# Altium PCB power amp.PcbDoc
Units mm, origin at the board's own origin, x right, y up, seen from the top; angles counter-clockwise.
Board outline 166.75 x 72.39 mm, 2 copper layers (Top Layer, Bottom Layer); 36 components, 39 nets, 132 pads, 16 vias.
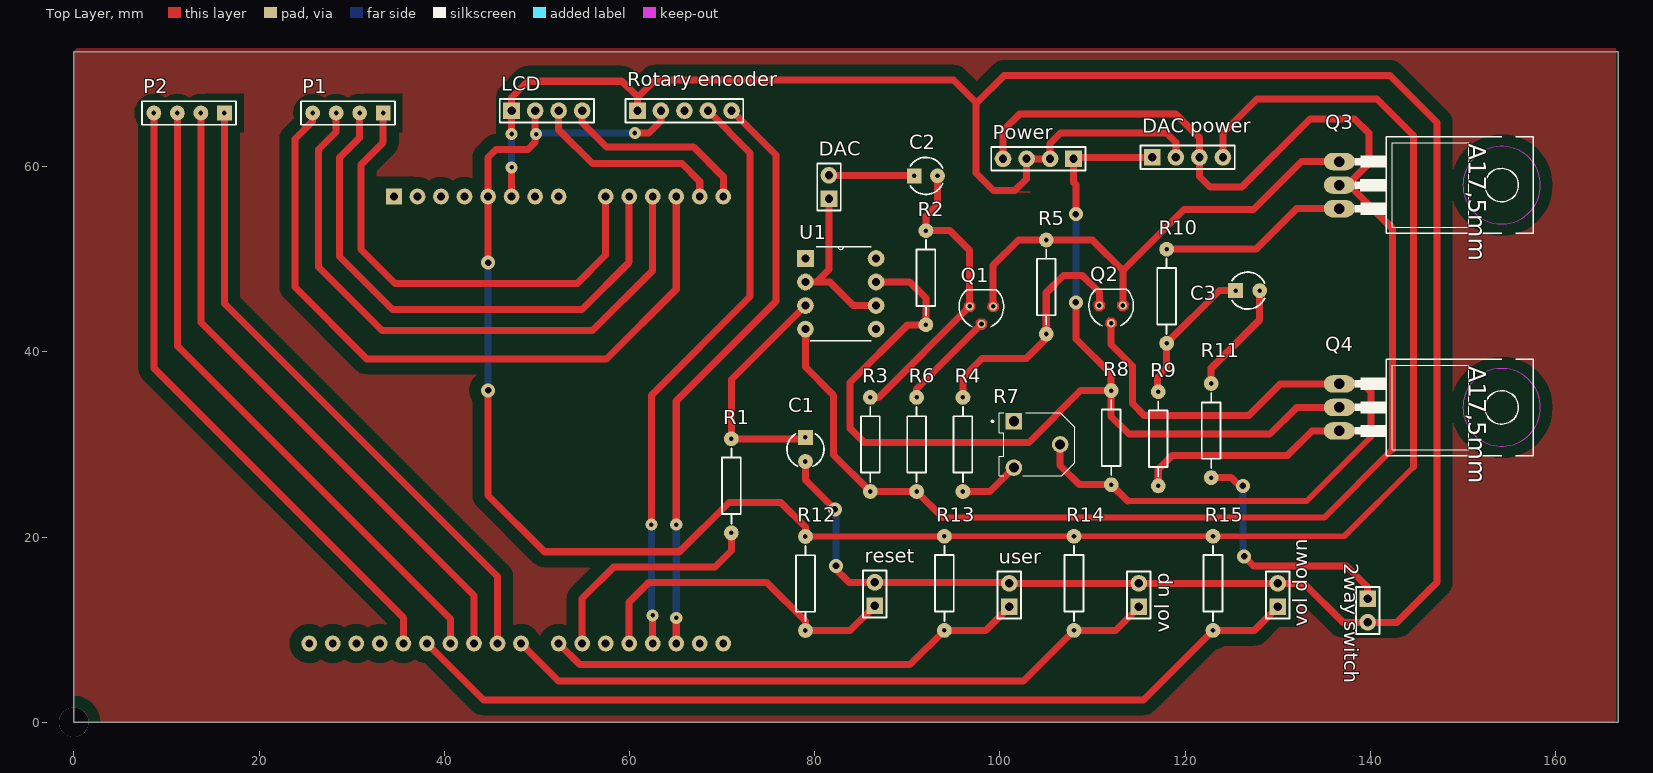
[diagram p0: Top Layer view]
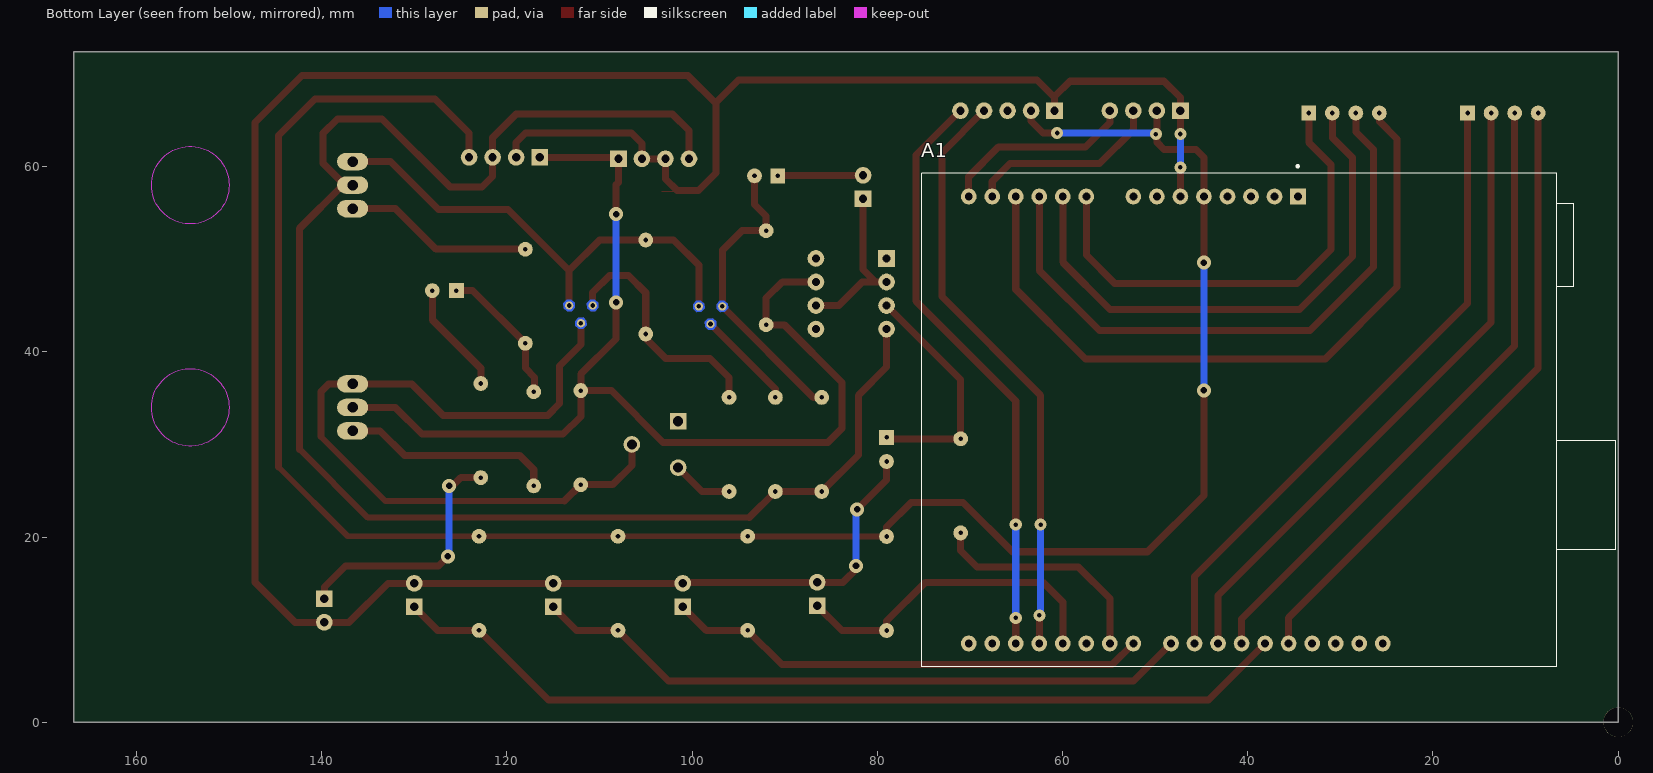
[diagram p1: Bottom Layer view, seen from below]

## Layer stack, top to bottom
Top Solder: solder mask 0.0102, Solder Resist, Dk 3.5
Top Layer: signal copper 0.0356
Dielectric 1: dielectric 0.32, FR-4, Dk 4.8
Bottom Layer: signal copper 0.0356
Bottom Solder: solder mask 0.0102, Solder Resist, Dk 3.5

## Board outline
0,0 166.751,0 166.751,72.39 0,72.39

## Design rules (kind name [scope] priority, off if disabled: settings)
Clearance Clearance_1 [InNamedPolygon('Top Layer-GND')] p1: gap=1.27 ignorepadtopadclearanceinfootprint=FALSE
Clearance [All] p2: gap=0.254 ignorepadtopadclearanceinfootprint=FALSE except(0: Arc-Hole Track-Hole SMDPad-Hole THPad-Hole Via-Hole Fill-Hole Poly-Hole Region-Hole Text-Hole; 0.508: Arc-Arc Arc-Track Arc-THPad Track-Track Track-THPad)
PolygonConnect [All] p1: connectstyle=Relief reliefconductorwidth=0.254 reliefentries=4 polygonreliefangle="90 Angle" airgapwidth=0.254
RoutingVias [All] p1: holewidth=0.711 width=1.27 viastyle="Through Hole" minholewidth=0.711 minwidth=1.27 maxholewidth=0.711 maxwidth=1.27
SolderMaskExpansion [All] p1: expansion=0.102
Width [All] p1: maxlimit=0.813 minlimit=0.508 preferedwidth=0.762 minimp=50.000000 maximp=50.000000 favimp=50.000000
30 further rules are at their usual default settings.

## Components (designator, comment, footprint, x,y, rotation, side; value= is the part's Value field where it differs from the comment)
"2way switch" "Header 2" HDR1X2 139.7,13.335 r270 top
A1 "ARDUINO_UNO_REV3_DEVELOPMENT_BOARD" *ARDUINO_UNO_REV3_DEVELOPMENT_BOARD 40.915,32.639 r270 bottom
C1 "Cap2" CAPR5-4X5#1 78.994,29.464 r270 top value=0.01uF
C2 "Cap2" CAPR5-4X5#2 92,59 r0 top value=47uF
C3 "Cap2" CAPR5-4X5#1 126.746,46.609 r0 top value=33uF
DAC "Header 2" HDR1X2 81.534,56.515 r90 top
"DAC power" "Header 4" HDR1X4#1 116.46,61 r0 top
LCD "Header 4" HDR1X4#1 47.265,66.04 r0 top
P1 "Header 4" HDR1X4#2 33.401,65.786 r180 top
P2 "Header 4" HDR1X4#2 16.256,65.786 r180 top
Power "Header 4" HDR1X4#1 107.95,60.833 r180 top
Q1 "BC640" *SOT54D_BC640(Primary) 98,44.905 r180 top
Q2 "BC639" *SOT54D_BC639(Primary) 112,45 r180 top
Q3 "TIP125" *TO220 143,58 r270 top
Q4 "TIP120" *TO220AH_TIP120(Primary) 143,34 r270 top
R1 "Res2" AXIAL-0.4 70.993,25.527 r90 top value=12K
R2 "Res2" AXIAL-0.4 92,48 r270 top value=22K
R3 "Res2" AXIAL-0.4 86,30 r90 top value=15K
R4 "Res2" AXIAL-0.4 96,30 r270 top value=2.2K
R5 "Res2" AXIAL-0.4 105,47 r270 top value=4.7K
R6 "Res2" AXIAL-0.4 91,30 r90 top value=4.7K
R7 "3306F-1-104" *TRIM_3306F-1-104 104,30 r180 top
R8 "Res2" AXIAL-0.4 112.014,30.734 r90 top value=10K
R9 "Res2" AXIAL-0.4 117.094,30.607 r270 top value=1
R10 "Res2" AXIAL-0.4 118,46 r270 top value=1
R11 "Res2" AXIAL-0.4 122.809,31.496 r90 top value=1K
R12 "Res2" AXIAL-0.4 78.994,14.986 r270 top value=12K
R13 "Res2" AXIAL-0.4 94,15 r270 top value=12K
R14 "Res2" AXIAL-0.4 108,15 r270 top value=12K
R15 "Res2" AXIAL-0.4 123,15 r270 top value=12K
reset "Header 2" HDR1X2 86.487,12.573 r90 top
"Rotary encoder" "Header 5" HDR1X5 60.854,66.04 r0 top
U1 "TL071CP" *DIP254P762X508-8 86.62,42.46 r0 top
user "Header 2" HDR1X2 101,12.46 r90 top
"vol down" "Header 2" HDR1X2 130,12.46 r90 top
"vol up" "Header 2" HDR1X2 115,12.46 r90 top

## Footprints (in the part's own frame and the unit in brackets; to place one, negate y for a bottom-side part, rotate by r counter-clockwise, add the part's x,y. Pads: shape width x height; smd on the part's side, far side on the other; paste and mask are expansions set on the pad)
*ARDUINO_UNO_REV3_DEVELOPMENT_BOARD [mm]
  rect 1.7x1.7 hole 0.85: 1(-24.13,6.35)
  round 1.7 hole 0.85: 2(-24.13,3.81) 3(-24.13,1.27) 4(-24.13,-1.27) 5(-24.13,-3.81) 6(-24.13,-6.35) 7(-24.13,-8.89) 8(-24.13,-11.43) 9(-24.13,-16.51) 10(-24.13,-19.05) 11(-24.13,-21.59) 12(-24.13,-24.13) 13(-24.13,-26.67) 14(-24.13,-29.21) 15(24.13,-29.21) 16(24.13,-26.67) 17(24.13,-24.13) 18(24.13,-21.59) 19(24.13,-19.05) 20(24.13,-16.51) 21(24.13,-13.97) 22(24.13,-11.43) 23(24.13,-7.366) 24(24.13,-4.826) 25(24.13,-2.286) 26(24.13,0.254) 27(24.13,2.794) 28(24.13,5.334) 29(24.13,7.874) 30(24.13,10.414) 31(24.13,12.954) 32(24.13,15.494)
  round 0.01 hole 3.2 unplated: None(32.639,40.915)
  round 3.2 hole 3.2 unplated: None(32.639,40.915) None(32.639,40.915)
  round 0.1 hole 0.1 unplated: None(32.639,40.915)
  silkscreen extent -27.52,-34.29 26.67,40.64
*DIP254P762X508-8 [mm]
  rect 1.8x1.8 hole 0.9: 1(-7.62,7.62)
  round 1.8 hole 0.9: 2(-7.62,5.08) 3(-7.62,2.54) 4(-7.62,0) 5(0,0) 6(0,2.54) 7(0,5.08) 8(0,7.62)
  silkscreen extent -7.11,-1.27 -0.51,8.89
*SOT54D_BC639(Primary) [mm] "TO, Flat Index; 3 In-Line, Axial Leads; Body Dia. 4.5mm; Leads 0.51 x 0.48 mm (max)"
  round 0.9 hole 0.5: B(1.27,0) C(0,1.905) E(-1.27,0)
  Top Layer region: -0.649,0.226 -0.991,0.599 -1.496,0.621 -1.869,0.279 -1.891,-0.226 -1.549,-0.599 -1.044,-0.621 -0.671,-0.279
  Top Layer region: 0.621,2.131 0.279,2.504 -0.226,2.526 -0.599,2.184 -0.621,1.679 -0.279,1.306 0.226,1.284 0.599,1.626
  Top Layer region: 1.891,0.226 1.549,0.599 1.044,0.621 0.671,0.279 0.649,-0.226 0.991,-0.599 1.496,-0.621 1.869,-0.279
  Bottom Layer region: -0.649,0.226 -0.991,0.599 -1.496,0.621 -1.869,0.279 -1.891,-0.226 -1.549,-0.599 -1.044,-0.621 -0.671,-0.279
  Bottom Layer region: 0.621,2.131 0.279,2.504 -0.226,2.526 -0.599,2.184 -0.621,1.679 -0.279,1.306 0.226,1.284 0.599,1.626
  Bottom Layer region: 1.891,0.226 1.549,0.599 1.044,0.621 0.671,0.279 0.649,-0.226 0.991,-0.599 1.496,-0.621 1.869,-0.279
  Multi-Layer region: -0.649,0.226 -0.991,0.599 -1.496,0.621 -1.869,0.279 -1.891,-0.226 -1.549,-0.599 -1.044,-0.621 -0.671,-0.279
  Multi-Layer region: 0.621,2.131 0.279,2.504 -0.226,2.526 -0.599,2.184 -0.621,1.679 -0.279,1.306 0.226,1.284 0.599,1.626
  Multi-Layer region: 1.891,0.226 1.549,0.599 1.044,0.621 0.671,0.279 0.649,-0.226 0.991,-0.599 1.496,-0.621 1.869,-0.279
  silkscreen extent -2.41,-1.78 2.41,2.2
*SOT54D_BC640(Primary) [mm]
  round 0.9 hole 0.5: B(1.27,0) C(0,1.905) E(-1.27,0)
  Top Layer region: -0.649,0.226 -0.991,0.599 -1.496,0.621 -1.869,0.279 -1.891,-0.226 -1.549,-0.599 -1.044,-0.621 -0.671,-0.279
  Top Layer region: 0.621,2.131 0.279,2.504 -0.226,2.526 -0.599,2.184 -0.621,1.679 -0.279,1.306 0.226,1.284 0.599,1.626
  Top Layer region: 1.891,0.226 1.549,0.599 1.044,0.621 0.671,0.279 0.649,-0.226 0.991,-0.599 1.496,-0.621 1.869,-0.279
  Bottom Layer region: -0.649,0.226 -0.991,0.599 -1.496,0.621 -1.869,0.279 -1.891,-0.226 -1.549,-0.599 -1.044,-0.621 -0.671,-0.279
  Bottom Layer region: 0.621,2.131 0.279,2.504 -0.226,2.526 -0.599,2.184 -0.621,1.679 -0.279,1.306 0.226,1.284 0.599,1.626
  Bottom Layer region: 1.891,0.226 1.549,0.599 1.044,0.621 0.671,0.279 0.649,-0.226 0.991,-0.599 1.496,-0.621 1.869,-0.279
  Multi-Layer region: -0.649,0.226 -0.991,0.599 -1.496,0.621 -1.869,0.279 -1.891,-0.226 -1.549,-0.599 -1.044,-0.621 -0.671,-0.279
  Multi-Layer region: 0.621,2.131 0.279,2.504 -0.226,2.526 -0.599,2.184 -0.621,1.679 -0.279,1.306 0.226,1.284 0.599,1.626
  Multi-Layer region: 1.891,0.226 1.549,0.599 1.044,0.621 0.671,0.279 0.649,-0.226 0.991,-0.599 1.496,-0.621 1.869,-0.279
  silkscreen extent -2.41,-1.78 2.41,2.2
*TO220 [mil]
  oval 73.86x132 hole 44: 1(-100,-250) 2(0,-250) 3(100,-250)
  round 130 hole 130 unplated: None(0,13976.38)
  Keep-Out Layer circle w0: c0,440 r165
  Keep-Out Layer circle w0: c0,440 r165
  Keep-Out Layer circle w0: c0,440 r165
  Keep-Out Layer circle w0: c0,440 r165
  Keep-Out Layer circle w0: c0,440 r165
  Keep-Out Layer circle w0: c0,440 r165
  silkscreen extent -205,-185 205,575
*TO220AH_TIP120(Primary) [mil]
  oval 73.86x132 hole 44: B(-100,-250) C(0,-250) E(100,-250)
  round 130 hole 130 unplated: None(0,13937.01)
  Keep-Out Layer circle w0: c0,440 r165
  Keep-Out Layer circle w0: c0,440 r165
  Keep-Out Layer circle w0: c0,440 r165
  Keep-Out Layer circle w0: c0,440 r165
  Keep-Out Layer circle w0: c0,440 r165
  Keep-Out Layer circle w0: c0,440 r165
  silkscreen extent -205,-185 205,575
*TRIM_3306F-1-104 [mm]
  rect 1.8x1.8 hole 1.1: 1(2.5,-2.5)
  round 1.8 hole 1.1: 2(-2.5,0) 3(2.5,2.5)
  silkscreen extent -4.05,-3.41 4.9,3.4
AXIAL-0.4 [mm] "Axial Device, Thru-Hole; 2 Leads; 0.4 in Pin Spacing"
  round 1.6 hole 0.5: 1(-5.08,0) 2(5.08,0)
  silkscreen extent -4.06,-1.02 4.06,1.02
CAPR5-4X5#1 [mm] "Capacitor; 2 Leads"
  rect 1.6x1.6 hole 0.5: 1(-1.3,0)
  round 1.6 hole 0.5: 2(1.3,0)
  silkscreen extent -1.69,-2 1.82,2
CAPR5-4X5#2 [mm] "Capacitor; 2 Leads"
  rect 1.6x1.6 hole 0.5: 1(-1.25,0)
  round 1.6 hole 0.5: 2(1.25,0)
  silkscreen extent -1.69,-2 1.82,2
HDR1X2 [mm] "Connector; Header; 2 Position"
  rect 1.8x1.8 hole 0.9: 1(0,0)
  round 1.8 hole 0.9: 2(2.54,0)
  silkscreen extent -1.27,-1.27 3.81,1.27
HDR1X4#1 [mm] "Connector; Header; 4 Position"
  rect 1.8x1.8 hole 0.9: 1(0,0)
  round 1.8 hole 0.9: 2(2.54,0) 3(5.08,0) 4(7.62,0)
  silkscreen extent -1.27,-1.27 8.89,1.27
HDR1X4#2 [mm] "Connector; Header; 4 Position"
  rect 1.6x1.6 hole 0.5: 1(0,0)
  round 1.6 hole 0.5: 2(2.54,0) 3(5.08,0) 4(7.62,0)
  silkscreen extent -1.27,-1.27 8.89,1.27
HDR1X5 [mm] "Connector; Header; 5 Position"
  rect 1.8x1.8 hole 0.9: 1(0,0)
  round 1.8 hole 0.9: 2(2.54,0) 3(5.08,0) 4(7.62,0) 5(10.16,0)
  silkscreen extent -1.27,-1.27 11.43,1.27

## Part data
"2way switch" DAC reset user "vol down" "vol up": "Header, 2-Pin", LatestRevisionDate=17-Jul-2002, LatestRevisionNote="Re-released for DXP Platform.", Publisher="Altium Limited"
A1: "Plated Through Hole Protoboard Arduino Mega Platform Evaluation Expansion Board", Package=None, Availability=Unavailable, MF=Arduino, MP="ARDUINO UNO REV3 DEVELOPMENT BOARD", Price=None, SnapEDA_Link=https://www.snapeda.com/parts/ARDUINO%20UNO%20REV3%20DEVELOPMENT%20BOARD/Arduino/view-part/424299/?ref=snap
C1 C2 C3: "Capacitor", PackageDescription="Capacitor; 2 Leads", PackageReference=CAPR5-4X5, Published=23-Sep-2002, Publisher="Altium Limited"
"DAC power" LCD P1 P2 Power: "Header, 4-Pin", LatestRevisionDate=17-Jul-2002, LatestRevisionNote="Re-released for DXP Platform.", Publisher="Altium Limited"
Q1: "Bipolar _BJT_ Transistor PNP 80V 500mA 150MHz 625mW Through Hole TO-92-3", Package="TO-92 Continental Device", Availability=Unavailable, MF="ON Semiconductor", MP=BC640, Price=None, SnapEDA_Link=https://www.snapeda.com/parts/BC640/ON%20Semiconductor/view-part/2782146/?ref=snap
Q2: "Bipolar _BJT_ Transistor NPN 80V 1A 200MHz 625mW Through Hole TO-92-3", Package="TO-92 Continental Device", Availability=Unavailable, MF="ON Semiconductor", MP=BC639, Price=None, SnapEDA_Link=https://www.snapeda.com/parts/BC639/ON%20Semiconductor/view-part/761111/?ref=snap
Q3: "Bipolar _BJT_ Transistor PNP - Darlington 60V 5A 2W Through Hole TO-220-3", Package="TO-220 Fairchild Semiconductor", Availability=Unavailable, MF="ON Semiconductor", MP=TIP125, Price=None, SnapEDA_Link=https://www.snapeda.com/parts/TIP125/ON%20Semiconductor/view-part/110798/?ref=snap
Q4: "Bipolar _BJT_ Transistor NPN - Darlington 60V 5A 2W Through Hole TO-220-3", Package="TO-220-3 Bourns", Availability=Unavailable, MF="ON Semiconductor", MP=TIP120, Price=None, SnapEDA_Link=https://www.snapeda.com/parts/TIP120/ON%20Semiconductor/view-part/2842527/?ref=snap
R1 R2 R3 R4 R5 R6 R8 R9 R10 R11 R12 R13 R14 R15: "Resistor", LatestRevisionDate=17-Jul-2002, LatestRevisionNote="Re-released for DXP Platform.", PackageDescription="Axial Device, Thru-Hole; 2 Leads; 0.4 in Pin Spacing", PackageReference=AXIAL-0.4, Published=8-Jun-2000, Publisher="Altium Limited"
R7: "100 kOhms 0.2W, 1/5W PC Pins Through Hole Trimmer Potentiometer Cermet 1 Turn Top Adjustment", Package="6432 Bourns", Availability=Unavailable, MF=Bourns, MP=3306F-1-104, Price=None, SnapEDA_Link=https://www.snapeda.com/parts/3306F-1-104/Bourns/view-part/372285/?ref=snap
"Rotary encoder": "Header, 5-Pin", LatestRevisionDate=17-Jul-2002, LatestRevisionNote="Re-released for DXP Platform.", Publisher="Altium Limited"
U1: "J-FET Amplifier 1 Circuit 8-PDIP", Package="DIP-8 Texas Instruments", Availability=Unavailable, MF="Texas Instruments", MP=TL071CP, Price=None, SnapEDA_Link=https://www.snapeda.com/parts/TL071CP/Texas%20Instruments/view-part/52481/?ref=snap

## Via types
v1: diameter 1.3, hole 0.5, Top Layer to Bottom Layer, 8 vias
v2: diameter 1.5, hole 0.711, Top Layer to Bottom Layer, 8 vias

## Nets (pads, with @x,y where several pads share a name; then routed paths per layer and width w, separated by ;. In a path a pad name is that pad's centre, name@x,y a point inside that pad or via, vN(x,y) a via of type N, cw(c..) or ccw(c..) an arc to the next point about the centre after c; other vN are vias at no path point)
+5V: "DAC power.4" "Rotary encoder.2" A1.5 LCD.2 R12.1 R13.1 R14.1 R15.1 | length 233.1
  Top Layer w0.635: R12.1 R13.1@93.986,20.066 ; R13.1 R14.1 R15.1 137.174,20.08 144.653,27.559
  Top Layer w0.762: v2(44.725,35.835) 44.725,24.49 50.8,18.415 65.405,18.415 70.739,23.749 76.331,23.749 78.994,21.086 R12.1 ; v2(44.725,49.636) A1.5 44.725,60.981 45.593,61.849 49.022,61.849 49.805,62.632 v1@49.805,63.606 ; v1@49.784,63.627 v1@49.805,63.606 ; LCD.2 v1@49.805,63.606 ; v1(49.911,63.5) v1@49.805,63.606 ; v1(60.579,63.627) 62.103,63.627 63.394,64.918 63.394,66.04 ; R13.1@93.986,20.066 R13.1 ; 124.08,61 124.08,63.628 127.762,67.31 140.716,67.31 144.653,63.373 144.653,27.559
  Bottom Layer w0.762: v2(44.725,35.835) v2(44.725,49.636) ; v1(49.911,63.5) 50.038,63.627 v1(60.579,63.627)
+15V: "DAC power.1" Power.1 Q4.C R2.2 R8.2 U1.7 | length 126.9
  Top Layer w0.762: U1.7 90.255,47.54 92,45.795 R2.2 90.037,42.92 83.82,36.703 83.82,31.75 85.344,30.226 103.124,30.226 108.712,35.814 R8.2 ; Power.1 107.95,58.293 108.204,58.039 v2(108.204,54.864) ; Power.1@107.95,60.96 116.42,60.96 116.46,61 110.08,61 ; v2(108.204,45.339) 108.204,41.402 112.014,37.592 R8.2 ; Q4.C 132.044,34 129.159,31.115 113.919,31.115 112,33.034 112,35.8 R8.2
  Bottom Layer w0.762: v2(108.204,45.339) v2(108.204,54.864)
-15V: "DAC power.3" Power.4 Q3.2 R3.1 R6.1 U1.4 | length 171.8
  Top Layer w0.635: 93.822,22.098 135.001,22.098 142.367,29.464
  Top Layer w0.762: U1.4 79,38.348 82.042,35.306 82.042,28.878 R3.1 R6.1 93.822,22.098 ; Power.4 100.33,63.881 102.108,65.659 118.999,65.659 121.54,63.118 121.54,61 121.54,58.927 122.682,57.785 126.111,57.785 133.477,65.151 138.303,65.151 139.827,63.627 139.827,60.325 Q3.2@137.502,58 ; Q3.2 Q3.2@137.502,58 ; 142.367,29.464 142.367,53.34 137.707,58 Q3.2@137.502,58
A0: A1.9 P1.1 | length 51.3
  Top Layer w0.762: P1.1 33.401,62.611 30.988,60.198 30.988,51.054 34.671,47.371 54.356,47.371 57.425,50.44 A1.9
A1: A1.10 P1.2 | length 59.2
  Top Layer w0.762: P1.2 30.861,63.119 28.702,60.96 28.702,50.292 34.417,44.577 54.864,44.577 59.965,49.678 A1.10
A2: A1.11 P1.3 | length 67
  Top Layer w0.762: P1.3 28.321,63.754 26.416,61.849 26.416,49.149 33.274,42.291 56.007,42.291 62.505,48.789 A1.11
A3: A1.12 P1.4 | length 77.1
  Top Layer w0.762: P1.4 25.781,64.897 23.876,62.992 23.876,46.99 31.623,39.243 57.531,39.243 65.045,46.757 A1.12
B1: C2.2 Q1.B R2.1 R3.2 | length 32.9
  Top Layer w0.762: R3.2 86.905,35.08 Q1.B 96.73,50.971 94.621,53.08 R2.1 92,54.662 93.25,55.912 C2.2
B2: Q2.B R4.1 R5.2 | length 26.5
  Top Layer w0.762: R4.1 96,37.223 98.044,39.267 102.846,39.267 105,41.421 R5.2 105,46.384 106.876,48.26 108.887,48.26 110.73,46.417 Q2.B
C1: Q1.C R6.2 | length 10.8
  Top Layer w0.762: R6.2 91,36 Q1.C
C2: Q2.C Q4.B R7.2 R8.1 | length 82.9
  Top Layer w0.635: 113.792,23.876 133.096,23.876 140.081,30.861
  Top Layer w0.762: R7.2 106.5,27.739 108.585,25.654 R8.1 113.792,23.876 ; Q2.C 112,40.781 114.3,38.481 114.3,34.417 115.57,33.147 126.873,33.147 130.266,36.54 Q4.B 139.228,36.54 140.081,35.687 140.081,30.861
CLK: "Rotary encoder.5" A1.17 | length 64
  Top Layer w0.762: A1.17 v1(65.045,11.282) ; v1(65.045,21.336) 65.045,34.692 75.819,45.466 75.819,61.235 71.014,66.04
  Bottom Layer w0.762: v1(65.045,11.282) v1(65.045,21.336)
D0: A1.15
D1: A1.16
D4: A1.19 R12.2 reset.1 | length 35.7
  Top Layer w0.762: A1.19 59.965,12.975 62.103,15.113 74.807,15.113 78.994,10.926 R12.2 83.82,9.906 reset.1
D5: A1.20
D6: A1.21 R1.1 | length 25
  Top Layer w0.762: A1.21 54.885,13.356 58.293,16.764 69.215,16.764 70.993,18.542 R1.1
D7: A1.22 R13.2 user.1 | length 52.2
  Top Layer w0.762: A1.22 54.631,6.223 90.303,6.223 R13.2 98.46,9.92 user.1
D8: "vol up.1" A1.23 R14.2 | length 71.7
  Top Layer w0.762: A1.23 52.345,4.445 102.525,4.445 R14.2 112.46,9.92 115,12.46
D9: A1.24 P2.1 | length 69.5
  Top Layer w0.762: P2.1 16.256,45.212 45.741,15.727 A1.24
D10: A1.25 P2.2 | length 69.5
  Top Layer w0.762: P2.2 13.716,43.18 43.201,13.695 A1.25
D11: A1.26 P2.3 | length 69.5
  Top Layer w0.762: P2.3 11.176,40.64 40.661,11.155 A1.26
D12: "vol down.1" A1.27 R15.2 | length 98.6
  Top Layer w0.762: A1.27 44.217,2.413 115.493,2.413 R15.2 127.46,9.92 130,12.46
D13: A1.28 P2.4 | length 68.4
  Top Layer w0.762: P2.4 8.636,38.227 35.581,11.282 A1.28
"DAC in": DAC.1 U1.2 U1.6 | length 18.2
  Top Layer w0.762: U1.2 80.179,47.54 ; DAC.1 81.534,48.895 80.179,47.54 ; U1.6 84.159,45 81.619,47.54 80.179,47.54
"DAC out": C2.1 DAC.2 | length 9.2
  Top Layer w0.762: DAC.2 90.695,59.055 C2.1
DT: "Rotary encoder.4" A1.18 | length 63.9
  Top Layer w0.762: v1(62.357,21.336) 62.357,35.306 73.025,45.974 73.025,61.489 68.474,66.04 ; A1.18 v1(62.505,11.536)
  Bottom Layer w0.762: v1(62.357,21.336) 62.357,11.684 v1(62.505,11.536)
E: Q1.E Q2.E Q3.1 R5.1 | length 53
  Top Layer w0.762: Q1.E 99.27,49.359 101.991,52.08 R5.1 109.972,52.08 113.27,48.782 ; Q2.E 113.27,48.782 ; Q3.1 132.549,60.54 127.381,55.372 119.86,55.372 113.27,48.782
GND: "2way switch.2" "DAC power.2" "Rotary encoder.1" "vol down.2" "vol up.2" A1.6 C1.2 LCD.1 Power.2 Power.3 reset.2 user.2 | length 290.5
  Top Layer w0: 100.33,57.277 103.251,57.277
  Top Layer w0.762: A1.6 v1(47.265,59.923) ; v1(47.265,63.521) LCD.1 47.265,67.458 49.022,69.215 59.203,69.215 60.854,67.564 60.854,67.458 ; 60.854,66.04 60.854,67.458 ; C1.2 78.994,26.162 v2(82.169,22.987) ; v2(82.296,16.891) 82.169,16.891 82.042,16.764 83.693,15.113 reset.2 100.887,15.113 user.2 115,15 130,15 132.828,15 137.033,10.795 139.7,10.795 142.875,10.795 147.193,15.113 147.193,24.765 147.193,64.77 142.113,69.85 100.457,69.85 97.409,66.802 ; Power.2 Power.3 102.87,58.674 101.6,57.404 99.314,57.404 97.409,59.309 97.409,66.802 ; Power.2@105.41,60.96 105.41,62.484 106.553,63.627 117.983,63.627 119,62.61 119,61 ; 60.854,67.458 62.738,69.342 94.996,69.342 97.409,66.929 97.409,66.802
  Bottom Layer w0.762: v1(47.265,59.923) v1(47.265,63.521) ; v2(82.169,22.987) 82.042,22.86 82.296,22.606 v2(82.296,16.891)
NetC1_1: C1.1 R1.2 U1.3 | length 25.8
  Top Layer w0.762: C1.1 78.837,30.607 R1.2 70.993,36.993 U1.3
NetC3_1: C3.1 R9.1 R10.2 | length 15.5
  Top Layer w0.762: R9.1 117,35.781 117,37.244 118,38.244 R10.2 123.689,46.609 C3.1
NetC3_2: C3.2 R11.2 | length 12.2
  Top Layer w0.762: R11.2 122.809,38.227 128.046,43.464 C3.2
NetQ3_3: Q3.3 R10.1 | length 20.5
  Top Layer w0.762: R10.1 127.661,51.08 132.041,55.46 Q3.3
NetQ4_E: Q4.E R9.2 | length 23.1
  Top Layer w0.762: R9.2 117.094,27.305 118.618,28.829 131.064,28.829 133.695,31.46 Q4.E
NetR4_2: R4.2 R7.3 | length 6.6
  Top Layer w0.762: R4.2 98.92,24.92 R7.3
Out: "2way switch.1" R11.1 | length 27.4
  Top Layer w0.762: R11.1 124.968,26.416 125.857,25.527 v2(126.238,25.527) ; v2(126.365,17.907) 127.381,16.891 137.414,16.891 139.7,14.605 139.7,13.335
  Bottom Layer w0.762: v2(126.238,25.527) 126.238,18.034 v2(126.365,17.907)
SCL: A1.14 LCD.4 | length 21.1
  Top Layer w0.762: LCD.4 54.885,64.749 57.531,62.103 66.929,62.103 70.125,58.907 A1.14
SDA: A1.13 LCD.3 | length 21.2
  Top Layer w0.762: LCD.3 52.345,63.987 56.007,60.325 65.659,60.325 67.585,58.399 A1.13
SW: "Rotary encoder.3"
pads on no net: A1.1 A1.2 A1.3 A1.4 A1.7 A1.8 A1.29 A1.30 A1.31 A1.32 A1.None Q3.None Q4.None R7.1 U1.1 U1.5 U1.8

## Polygon pours and split planes (outlines as drawn)
GND on Top Layer "Top Layer-GND" (solid, pour order 0): 0,72.39 0.381,72.771 166.497,72.771 166.497,0.127 166.37,0 0,0

## Text inside footprints (layer, text, board x,y; h text height)
Q3: Top Overlay "A17,5mm" at 150.625,62.445 h1.88 r270; Mechanical 4 "1" at 142.75,61.176 h1.88 r270; Mechanical 4 "2" at 142.75,58.636 h1.88 r270; Mechanical 4 "3" at 142.75,56.095 h1.88 r270; Mechanical 4 "1" at 142.75,61.176 h1.88 r270; Mechanical 4 "2" at 142.75,58.636 h1.88 r270; Mechanical 4 "3" at 142.75,56.095 h1.88 r270
Q4: Top Overlay "A17,5mm" at 150.631,38.449 h1.88 r270